# Altium PCB boardR.PcbDoc
Units mil, origin at the board's own origin, x right, y up, seen from the top; angles counter-clockwise.
Board outline 2200 x 3540 mil, 2 copper layers (Top Layer, Bottom Layer); 39 components, 40 nets, 157 pads, 0 vias.
Unrouted connection lines stored in the file: 16.
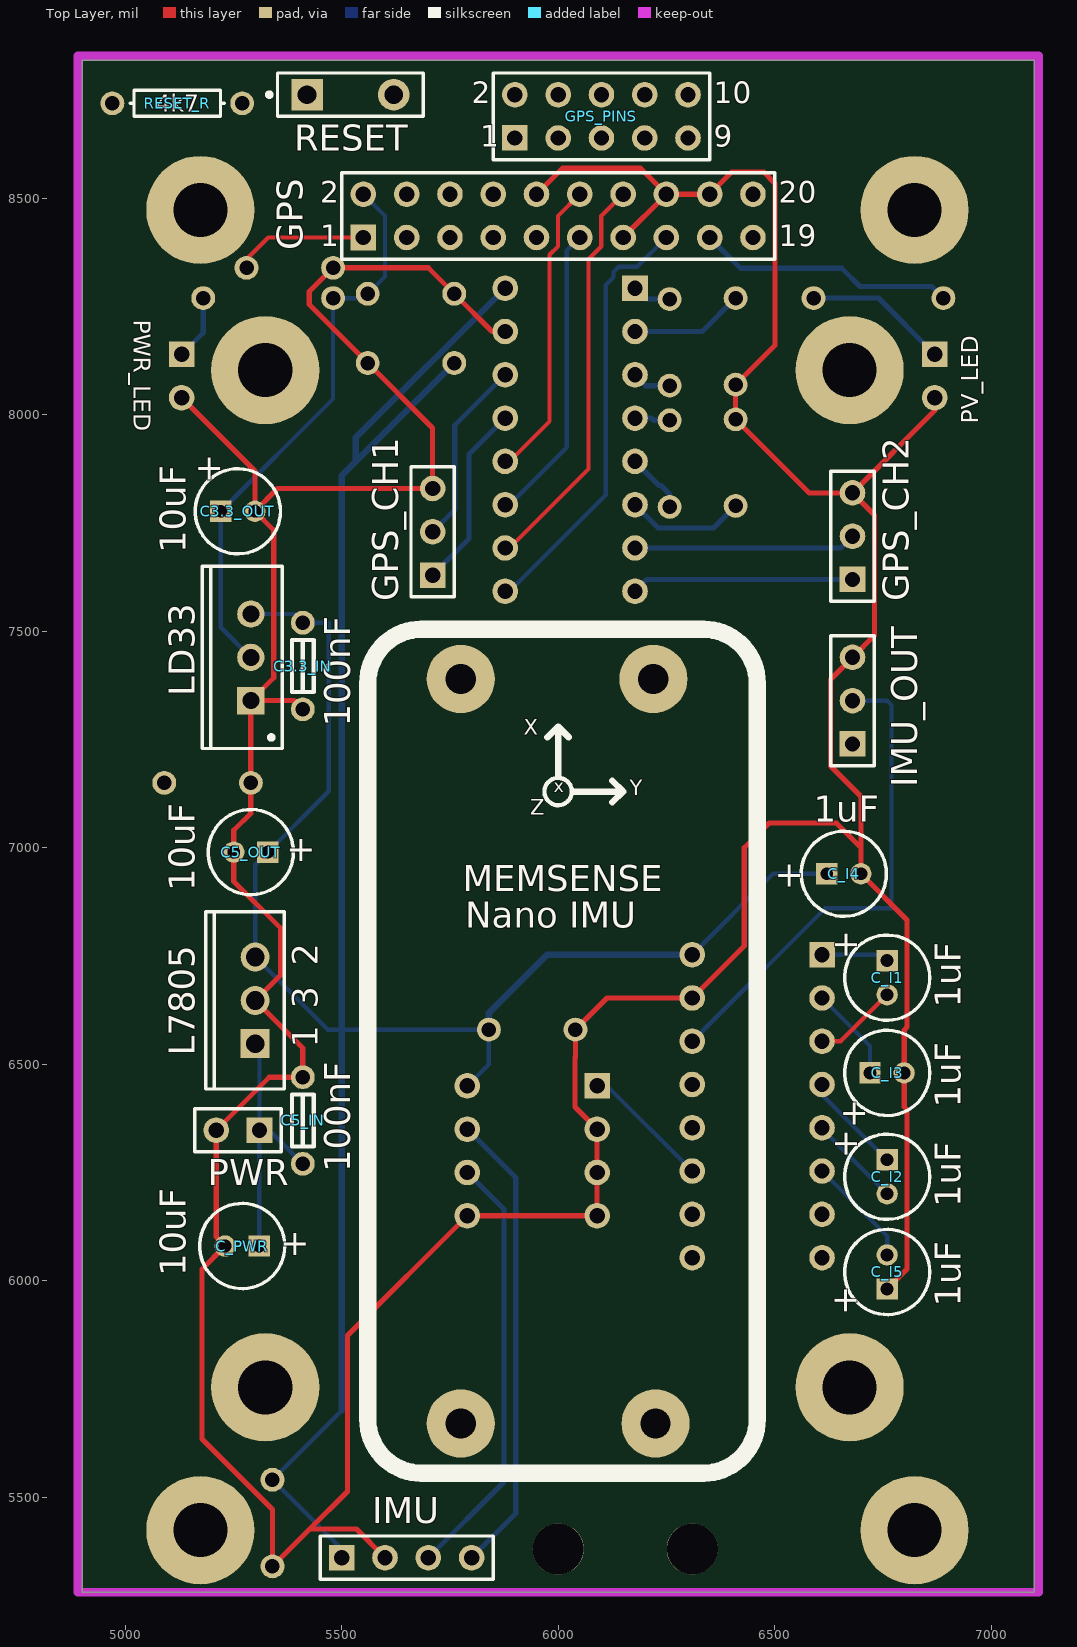
[diagram p0: Top Layer view]
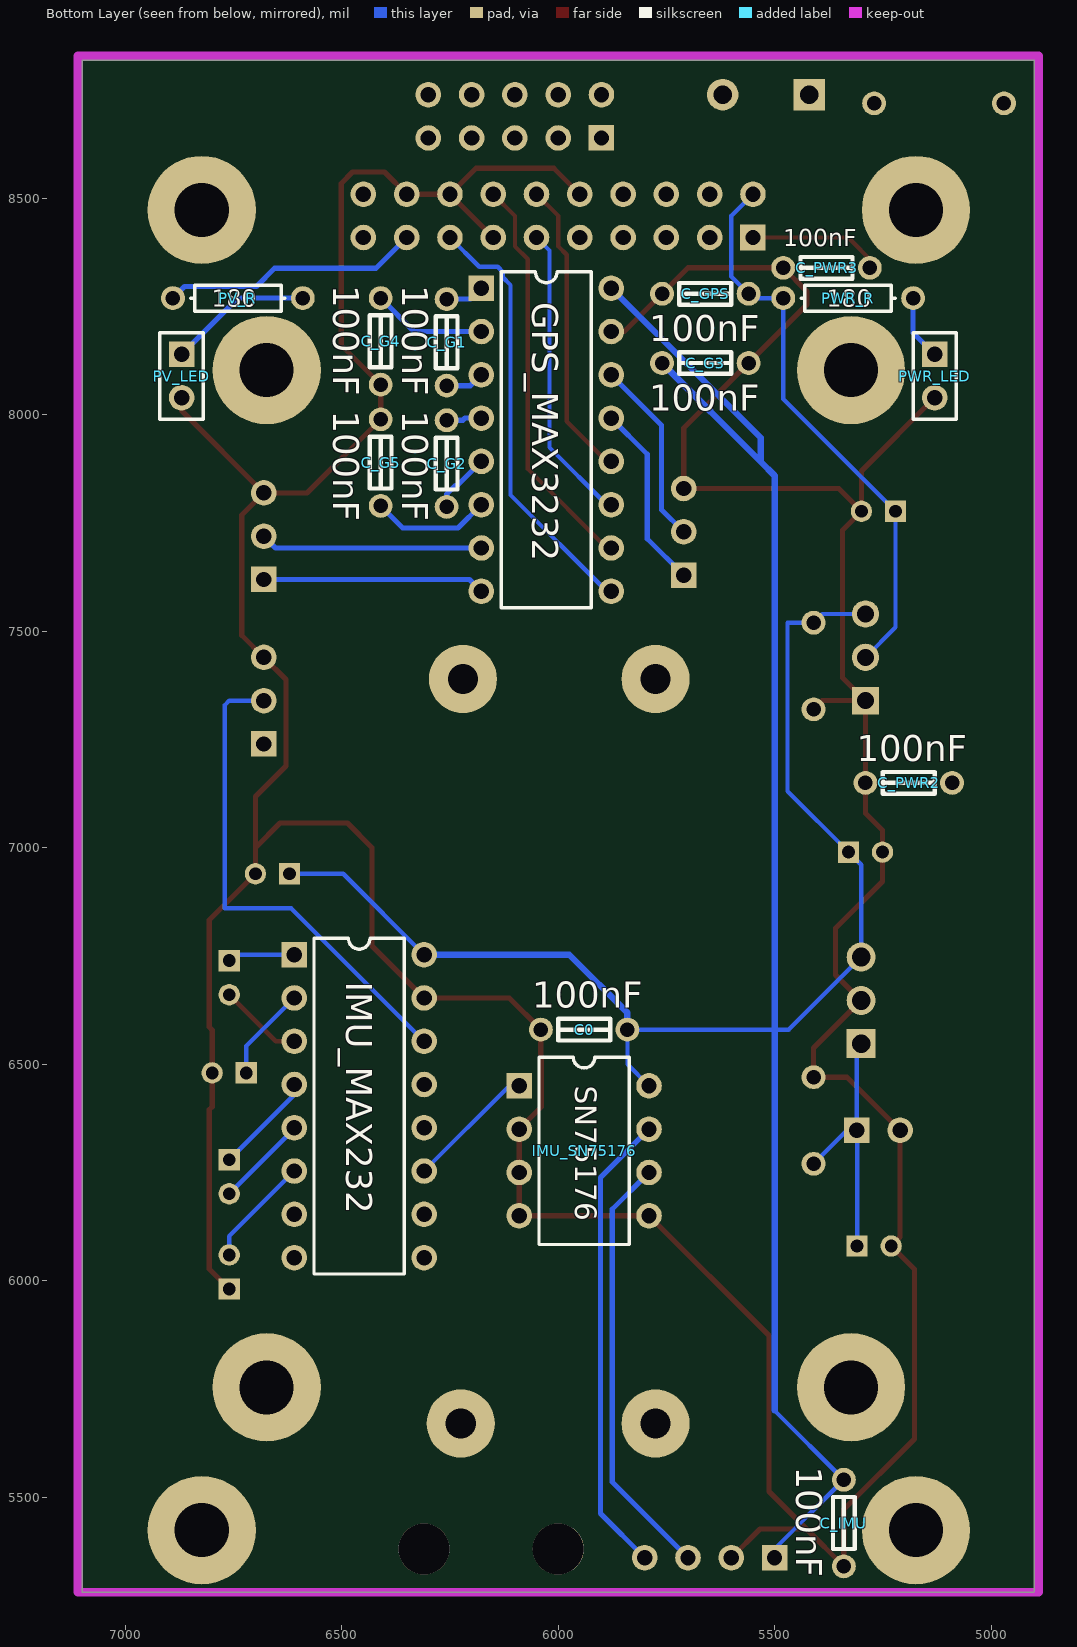
[diagram p1: Bottom Layer view, seen from below]

## Layer stack, top to bottom
Top Layer: signal copper 1.4
Dielectric: dielectric 12.6, FR-4, Dk 4.8
Bottom Layer: signal copper 1.4

## Board outline
4900,5280 7100,5280 7100,8820 4900,8820

## Design rules (kind name [scope] priority, off if disabled: settings)
Clearance [All] p1: gap=15
PolygonConnect [All] p1: connectstyle=Relief reliefconductorwidth=10 reliefentries=4 polygonreliefangle="90 Angle"
RoomDefinition schematic [InComponentClass('schematic')] p1: confinementstyle=ConfineIn formatcopy=TRUE lockcomponents=FALSE outline 3990,5110 3990,8880 4800,8880 4800,5110
RoutingLayers RoutingLayers_1 [InNet('GND')] p1: top layer_v5=TRUE bottom layer_v5=FALSE
RoutingLayers [All] p2: top layer_v5=FALSE bottom layer_v5=TRUE
RoutingTopology RoutingTopology_1 [(InNet('3.3V') OR InNet('5V') OR InNet('12V'))] p1: topology=Starburst
RoutingTopology [All] p2: topology=Shortest
RoutingVias [All] p1: holewidth=28 width=50 viastyle="Through Hole" minholewidth=28 minwidth=50 maxholewidth=28 maxwidth=50
SilkscreenOverComponentPads [All] p1: minsilkscreentomaskgap=10
SolderMaskExpansion [All] p1: expansion=4
TestPointUsage [All] p1: valid=0 allowmultiple=FALSE
Testpoint [All] p1: side=15 testpointundercomponent=TRUE minsize=40 maxsize=100 preferedsize=60 minholesize=0 maxholesize=40 preferedholesize=32 testpointgrid=1 style=1023 order=0-112345678
Width Width_1 [(InNet('3.3V') OR InNet('5V') OR InNet('12V'))] p1: maxlimit=20 minlimit=10 preferedwidth=15
Width [All] p2: maxlimit=20 minlimit=10 preferedwidth=12
21 further rules are at their usual default settings.

## Components (designator, comment, footprint, x,y, rotation, side; value= is the part's Value field where it differs from the comment)
C0 "100nF" C_NANO_HOLES 6040,6580 r180 bottom
C3.3_IN "100nF" C_NANO_HOLES 5410,7520 r270 top
C3.3_OUT "10uF" B 5260,7777.48 r0 top
C5_IN "100nF" C_NANO_HOLES 5410,6270 r90 top
C5_OUT "10uF" B 5290,6990 r180 top
C_G1 "100nF" C_NANO_HOLES 6257.56,8067.72 r90 bottom
C_G2 "100nF" C_NANO_HOLES 6257.56,7787.72 r90 bottom
C_G3 "100nF" C_NANO_HOLES 5560,8120 r0 bottom
C_G4 "100nF" C_NANO_HOLES 6410,8070 r90 bottom
C_G5 "100nF" C_NANO_HOLES 6410,7990 r270 bottom
C_GPS "100nF" C_NANO_HOLES 5760,8280 r180 bottom
C_I1 "1uF" B 6760,6700 r270 top
C_I2 "1uF" B 6760,6240 r270 top
C_I3 "1uF" B 6760,6480 r0 top
C_I4 "1uF" B 6660,6940 r0 top
C_I5 "1uF" B 6760,6020 r90 top
C_IMU "100nF" C_NANO_HOLES 5340,5340 r90 bottom
C_PWR "10uF" B 5270,6080 r180 top
C_PWR2 "100nF" C_NANO_HOLES 5290,7150 r180 bottom
C_PWR3 "100nF" C_NANO_HOLES 5480,8340 r180 bottom
GPS "Header 10X2" HDR2X10 5550,8410 r0 top
GPS_CH1 "MHDR1X3" HDR1X3 5710,7630 r90 top
GPS_CH2 "MHDR1X3" HDR1X3 6680,7620 r90 top
GPS_MAX3232 "MAX3232EEPE" PE16 6027.56,7942.72 r270 bottom
GPS_PINS "Header 5X2" HDR2X5 5900,8640 r0 top
IMU "Header 4" HDR1X4 5500,5360 r0 top
IMU_MAX232 "MAX232ACPE" PE16A 6459.69,6403.15 r270 bottom
IMU_OUT "MHDR1X3" HDR1X3 6680,7240 r90 top
IMU_SN75176 "SN75176" P008 5940,6300 r270 bottom
L7805 "L7805ACV" TO220ABN 5300,6647.48 r90 top
LD33 "LD33V" T03B 5290,7440 r90 top
PV_LED "LED" HDR1X2 6870,8140 r270 bottom
PV_R "180" AXIAL-0.3 6740,8270 r0 bottom
PWR "Header 2" HDR1X2 5310,6347.48 r180 top
PWR_LED "LED" HDR1X2 5130,8140 r270 bottom
PWR_R "180" AXIAL-0.3 5330,8270 r0 bottom
RESET "SW-PB" SPST-2 5520,8740 r0 top
RESET_R "4k7" AXIAL-0.3 5120,8720 r180 top
? "Comment" MEMSENSE_NANO_IMU 6000,6530 r0 top

## Footprints (in the part's own frame and the unit in brackets; to place one, negate y for a bottom-side part, rotate by r counter-clockwise, add the part's x,y. Pads: shape width x height; smd on the part's side, far side on the other; paste and mask are expansions set on the pad)
AXIAL-0.3 [mm] "Resistor; 2 Leads"
  round 1.4 hole 0.85: 1(-3.81,0) 2(3.81,0)
  silkscreen extent -2.77,-0.76 2.77,0.76
B [mm] "Capacitor, Electrolytic, Radial; Body 5 x 6.8 mm (Dia.xH typ); Pin Spacing 2 mm (typ)"
  rect 1.25x1.25 hole 0.75: 1(-1,0)
  round 1.25 hole 0.75: 2(1,0)
  silkscreen extent -2.5,-2.5 2.5,2.5
C_NANO_HOLES [mm] "C_NANO com furos maiores"
  round 1.4 hole 0.85: 1(0,0) 2(5.08,0)
  silkscreen extent 1.02,-0.64 4.06,0.63
HDR1X2 [mm] "Connector; Header; 2 Position"
  rect 1.5x1.5 hole 0.9: 1(0,0)
  round 1.5 hole 0.9: 2(2.54,0)
  silkscreen extent -1.27,-1.27 3.81,1.27
HDR1X3 [mm] "Connector; Header; 3 Position"
  rect 1.5x1.5 hole 0.9: 1(0,0)
  round 1.5 hole 0.9: 2(2.54,0) 3(5.08,0)
  silkscreen extent -1.27,-1.27 6.35,1.27
HDR1X4 [mm] "Connector; Header; 4 Position"
  rect 1.5x1.5 hole 0.9: 1(0,0)
  round 1.5 hole 0.9: 2(2.54,0) 3(5.08,0) 4(7.62,0)
  silkscreen extent -1.27,-1.27 8.89,1.27
HDR2X5 [mm] "Connector; Header; 5x2 Position"
  rect 1.5x1.5 hole 0.9: 1(0,0)
  round 1.5 hole 0.9: 2(0,2.54) 3(2.54,0) 4(2.54,2.54) 5(5.08,0) 6(5.08,2.54) 7(7.62,0) 8(7.62,2.54) 9(10.16,0) 10(10.16,2.54)
  silkscreen extent -1.27,-1.27 11.43,3.81
HDR2X10 [mm] "Connector; Header; 10x2 Position"
  rect 1.5x1.5 hole 0.9: 1(0,0)
  round 1.5 hole 0.9: 2(0,2.54) 3(2.54,0) 4(2.54,2.54) 5(5.08,0) 6(5.08,2.54) 7(7.62,0) 8(7.62,2.54) 9(10.16,0) 10(10.16,2.54) 11(12.7,0) 12(12.7,2.54) 13(15.24,0) 14(15.24,2.54) 15(17.78,0) 16(17.78,2.54) 17(20.32,0) 18(20.32,2.54) 19(22.86,0) 20(22.86,2.54)
  silkscreen extent -1.27,-1.27 24.13,3.81
MEMSENSE_NANO_IMU [mil]
  round 157.48 hole 70: 0(-225,860) 1(220,860) 2(-225,-860) 3(225,-860)
  silkscreen extent -440,-975 460,975
P008 [mm] "DIP; 8 Leads; Row Spacing 7.62 mm; Pitch 2.54 mm"
  rect 1.5x1.5 hole 0.9: 1(-3.81,-3.81)
  round 1.5 hole 0.9: 2(-1.27,-3.81) 3(1.27,-3.81) 4(3.81,-3.81) 5(3.81,3.81) 6(1.27,3.81) 7(-1.27,3.81) 8(-3.81,3.81)
  silkscreen extent -5.5,-2.65 5.5,2.65
PE16 [mm] "DIP; 16 Leads; Row Spacing 7.62 mm; Pitch 2.54 mm"
  rect 1.5x1.5 hole 0.9: 1(-8.89,-3.81)
  round 1.5 hole 0.9: 2(-6.35,-3.81) 3(-3.81,-3.81) 4(-1.27,-3.81) 5(1.27,-3.81) 6(3.81,-3.81) 7(6.35,-3.81) 8(8.89,-3.81) 9(8.89,3.81) 10(6.35,3.81) 11(3.81,3.81) 12(1.27,3.81) 13(-1.27,3.81) 14(-3.81,3.81) 15(-6.35,3.81) 16(-8.89,3.81)
  silkscreen extent -9.85,-2.65 9.85,2.65
PE16A [mm] "DIP; 16 Leads; Row Spacing 7.62 mm; Pitch 2.54 mm"
  rect 1.5x1.5 hole 0.9: 1(-8.89,-3.81)
  round 1.5 hole 0.9: 2(-6.35,-3.81) 3(-3.81,-3.81) 4(-1.27,-3.81) 5(1.27,-3.81) 6(3.81,-3.81) 7(6.35,-3.81) 8(8.89,-3.81) 9(8.89,3.81) 10(6.35,3.81) 11(3.81,3.81) 12(1.27,3.81) 13(-1.27,3.81) 14(-3.81,3.81) 15(-6.35,3.81) 16(-8.89,3.81)
  silkscreen extent -9.85,-2.65 9.85,2.65
SPST-2 [mm] "Circuit Breaker; 2 Leads"
  rect 1.85x1.85 hole 1.1: 1(-2.54,0)
  round 1.85 hole 1.1: 2(2.54,0)
  silkscreen extent -4.89,-1.27 4.28,1.27
T03B [mm] "TO, Thru-Hole, Vertical, Heatsink Mounted; 3 In-Line Leads; Pitch 2.54 mm"
  rect 1.6x1.6 hole 1: 1(-2.54,0)
  round 1.6 hole 1: 2(0,0) 3(2.54,0)
  silkscreen extent -5.35,-1.85 5.35,2.85, body extent -5.4,-1.9 5.4,2.9, height 19.4
TO220ABN [mm] "TO, Thru-Hole, Vertical, Heatsink Mounted; 3 In-Line Leads; Pitch 2.54 mm; Pin sequence 1, 3, 2"
  rect 1.7x1.7 hole 1.1: 1(-2.54,0)
  round 1.7 hole 1.1: 2(2.54,0) 3(0,0)
  silkscreen extent -5.2,-1.7 5.2,2.9

## Part data
C0 C3.3_IN C5_IN C_G1 C_G2 C_G3 C_G4 C_G5 C_GPS C_IMU C_PWR2 C_PWR3: library part Cap, "Capacitor"
C3.3_OUT C5_OUT C_I1 C_I2 C_I3 C_I4 C_I5 C_PWR: library part "Cap Pol1", "Polarized Capacitor (Radial)"
GPS: "Header, 10-Pin, Dual row"
GPS_CH1 GPS_CH2 IMU_OUT: "Header, 3-Pin"
GPS_MAX3232: "±15kV ESD-Protected, 3.0V to 5.5V, Low-Power, up to 250kbps, True RS-232 Transceiver"
GPS_PINS: "Header, 5-Pin, Dual row"
IMU: "Header, 4-Pin"
IMU_MAX232: "+5V Powered, Multi-Channel RS-232 Driver/Receiver"
IMU_SN75176: library part SN75176AP, "Differential Bus Transceiver"
L7805: "Precision 1A Regulator"
LD33: library part LM1117T-3.3, "800mA Low-Dropout Linear Regulator"
PV_LED PWR_LED: library part LED0, "Typical INFRARED GaAs LED"
PV_R PWR_R RESET_R: library part Res1, "Resistor"
PWR: "Header, 2-Pin"
RESET: "Switch"

## Free pads (board coordinates)
  round 250 hole 125: 0(5173.39,8473.58) 0(5323.39,8103.58) 1(6673.39,8103.58) 1(6823.39,8473.58) 2(6673.39,5753.58) 2(6823.39,5423.58) 3(5173.39,5423.58) 3(5323.39,5753.58)
  round 118.11 hole 118.11: ""(6000,5380) ""(6310,5380)

## Nets (pads, with @x,y where several pads share a name; then routed paths per layer and width w, separated by ;. In a path a pad name is that pad's centre, name@x,y a point inside that pad or via, vN(x,y) a via of type N, cw(c..) or ccw(c..) an arc to the next point about the centre after c; other vN are vias at no path point)
3.3V: C3.3_OUT.1 C_GPS.2 GPS.2 LD33.2 PWR_R.2 RESET_R.2 | length 1317.6
  Bottom Layer w10: LD33.2 5220.63,7509.37 C3.3_OUT.1 5480,8036.85 PWR_R.2 5550,8270 C_GPS.2 5600,8320 5600,8460 GPS.2
5V: C0.2 C3.3_IN.1 C5_OUT.1 C_G3.2 C_I4.1 C_IMU.2 GPS_MAX3232.16 IMU.1 IMU_MAX232.16 IMU_SN75176.8 L7805.2 LD33.3 | length 7168
  Bottom Layer w10: LD33.3 5390,7540 C3.3_IN.1 5470,7520 5470,7130.63 C5_OUT.1 5300,6960.63 L7805.2 5467.48,6580 5500,6580 ; IMU.1 5500,5380 C_IMU.2 5500,5700 5500,6580 ; IMU_SN75176.8 5840,6500 C0.2 5500,6580 ; IMU_MAX232.16 6496.54,6940 C_I4.1
  Bottom Layer w15: 5500,5700 5500,6279 5500,6580 5500,7860 5532,7892 ; C_G3.2 5532,7892 ; C0.2 5840,6619 5974.15,6753.15 IMU_MAX232.16 ; GPS_MAX3232.16 5532,7947.16 5532,7892
12V: C5_IN.1 C_PWR2.2 C_PWR3.2 C_PWR.1 GPS.1 L7805.1 PWR.1 | length 939.4
  Top Layer w10: C_PWR3.2@5270,8350 5330,8410 GPS.1
  Bottom Layer w10: L7805.1@5282.52,6547.48 L7805.1@5290,6547.48 ; L7805.1 5310,6537.48 PWR.1 5332.52,6347.48 C5_IN.1 ; C_PWR.1 PWR.1@5309.37,6346.85
  Bottom Layer w15: C_PWR3.2@5280,8326 C_PWR3.2 ; L7805.1@5290,6547.48 L7805.1
GND: C0.1 C3.3_IN.2 C3.3_OUT.2 C5_IN.2 C5_OUT.2 C_G3.1 C_G4.1 C_G5.1 C_GPS.1 C_I3.2 C_I4.2 C_I5.1 C_IMU.1 C_PWR2.1 C_PWR3.1 C_PWR.2 GPS.10 GPS.13 GPS.16 GPS.18 GPS_CH1.3 GPS_CH2.3 GPS_MAX3232.15 GPS_PINS.3 GPS_PINS.9 GPS_PINS.10 IMU.2 IMU_MAX232.15 IMU_OUT.3 IMU_SN75176.2 IMU_SN75176.3 IMU_SN75176.4 IMU_SN75176.5 L7805.3 LD33.1 PV_LED.2 PWR.2 PWR_LED.2 RESET.1 | length 11796.9
  Top Layer w12: PWR_LED.2 5299.37,7870.63 C3.3_OUT.2 ; C3.3_IN.2 5390,7340 LD33.1 ; IMU.2 5534,5426 5426,5426 ; GPS_MAX3232.15 5847.28,8192.72 C_GPS.1 5700,8340 C_PWR3.1 5425,8285 5425,8255 C_G3.1 5710,7970 GPS_CH1.3 5351.89,7830 C3.3_OUT.2 ; GPS.10 6010,8570 6190,8570 GPS.16 ; GPS.13 GPS.16 ; C_I5.1 6806,6026.63 6806,6395 6799.37,6401.63 C_I3.2 6799.37,6579.37 6806,6586 6806,6833.37 C_I4.2 6699.37,7000 ; PV_LED.2 6870,8010 GPS_CH2.3 ; LD33.1 C_PWR2.1 5290,7080 5250.63,7040.63 C5_OUT.2 5250.63,6922.37 5359,6814 5359,6706.48 L7805.3 5410,6537.48 C5_IN.2 5332.52,6470 PWR.2 5210,6100.63 C_PWR.2 5177,6026.37 5177,5634.33 5340,5471.33 C_IMU.1 5426,5426 ; LD33.1 5343,7393 5343,7733.85 C3.3_OUT.2 ; 5426,5426 5513,5513 5513,5873 IMU_SN75176.5 IMU_SN75176.4 IMU_SN75176.3 IMU_SN75176.2 6039,6401 6039,6515 6040,6516 C0.1 6113.15,6653.15 IMU_MAX232.15 6430,6773.46 6430,7000 6487,7057 6642.37,7057 6699.37,7000 ; GPS.16 GPS.18 6401,8561 6475,8561 6501,8535 6501,8161 C_G4.1 C_G5.1 6580,7820 GPS_CH2.3 ; GPS_CH2.3 6731,7769 6731,7491 IMU_OUT.3 6629,7389 6629,7189 6699.37,7118.63 6699.37,7000
GPS_CAN2_RX: GPS.8
GPS_CAN2_TX: GPS.20
GPS_COM1_RX: GPS.12 GPS_MAX3232.12 | length 684.6
  Top Layer w10: GPS_MAX3232.12@5887.56,7892.72 5980,7985.16 5980,8369.96 5999.53,8389.49 5999.53,8459.53 GPS.12
GPS_COM1_TX: GPS.11 GPS_MAX3232.11 | length 694.6
  Bottom Layer w10: GPS_MAX3232.11@5887.56,7792.72 6020,7925.16 6020,8380 GPS.11
  Bottom Layer w12: GPS_MAX3232.11 GPS_MAX3232.11@5887.56,7792.72
GPS_COM2_RX: GPS.15 GPS_MAX3232.9 | length 1002.3
  Bottom Layer w10: GPS_MAX3232.9@5887.56,7592.72 6110,7815.16 6110,8300 6128.03,8318.03 6128.03,8330.53 6139.75,8342.25 6182.25,8342.25 GPS.15
  Bottom Layer w12: GPS_MAX3232.9 GPS_MAX3232.9@5887.56,7592.72
GPS_COM2_TX: GPS.14 GPS_MAX3232.10 | length 926
  Top Layer w10: GPS_MAX3232.10@5887.56,7692.72 6070,7875.16 6070,8359.96 6099.53,8389.49 6099.53,8459.53 GPS.14
GPS_EVENT1: GPS.9 GPS_PINS.6
GPS_EVENT2: GPS.7 GPS_PINS.8
GPS_PPS: GPS.19 GPS_PINS.7
GPS_PV: GPS.17 GPS_PINS.5 PV_R.2 | length 598
  Bottom Layer w12: GPS.17 6421,8339 6655,8339 6697,8297 6863,8297 PV_R.2
GPS_RESETIN: GPS.5 GPS_PINS.4 RESET.2 RESET_R.1
GPS_USB_D+: GPS.4 GPS_PINS.1
GPS_USB_D-: GPS.3 GPS_PINS.2
GPS_VARF: GPS.6
IMU_HRS_A: IMU.3 IMU_SN75176.6 | length 997.7
  Bottom Layer w12: IMU.3 5875,5535 5875,6165 IMU_SN75176.6
IMU_HRS_B: IMU.4 IMU_SN75176.7 | length 1078.6
  Bottom Layer w12: IMU_SN75176.7 5902,6238 5902,5462 IMU.4
IMU_TX: IMU_MAX232.11 IMU_SN75176.1 | length 301.2
  Bottom Layer w10: IMU_SN75176.1 6112.84,6450 IMU_MAX232.11
J1_RX: GPS_CH1.2 GPS_MAX3232.14 | length 432.1
  Bottom Layer w12: GPS_CH1.2 5761,7781 5761,7976.16 GPS_MAX3232.14
J1_TX: GPS_CH1.1 GPS_MAX3232.13 | length 432.1
  Bottom Layer w12: GPS_CH1.1 5794,7714 5794,7909.16 GPS_MAX3232.13
J2_RX: GPS_CH2.2 GPS_MAX3232.7 | length 513.7
  Bottom Layer w12: GPS_MAX3232.7 6652.72,7692.72 GPS_CH2.2
J2_TX: GPS_CH2.1 GPS_MAX3232.8 | length 513.7
  Bottom Layer w12: GPS_MAX3232.8 6204.84,7620 GPS_CH2.1
J3_RX: IMU_MAX232.14 IMU_OUT.2 | length 1151.6
  Bottom Layer w10: IMU_MAX232.14 6616.54,6860 6770,6860 6770,7330 6760,7340 IMU_OUT.2
NetC_G1_1: C_G1.1 GPS_MAX3232.3 | length 90.4
  Bottom Layer w12: GPS_MAX3232.3 6202.56,8067.72 C_G1.1
NetC_G1_2: C_G1.2 GPS_MAX3232.1 | length 90.4
  Bottom Layer w12: GPS_MAX3232.1 6202.56,8267.72 C_G1.2
NetC_G2_1: C_G2.1 GPS_MAX3232.5 | length 140.8
  Bottom Layer w12: GPS_MAX3232.5 6233,7837.28 6237.5,7837.28 6257.56,7817.22 C_G2.1
NetC_G2_2: C_G2.2 GPS_MAX3232.4 | length 82.1
  Bottom Layer w12: GPS_MAX3232.4 6215,7992.72 6220,7987.72 C_G2.2
NetC_G4_2: C_G4.2 GPS_MAX3232.2 | length 264.5
  Bottom Layer w12: GPS_MAX3232.2 6332.72,8192.72 C_G4.2
NetC_G5_2: C_G5.2 GPS_MAX3232.6 | length 275.8
  Bottom Layer w12: GPS_MAX3232.6 6231.28,7739 6359,7739 C_G5.2
NetC_I1_1: C_I1.1 IMU_MAX232.1 | length 156
  Bottom Layer w10: IMU_MAX232.1 6746.22,6753.15 C_I1.1
NetC_I1_2: C_I1.2 IMU_MAX232.3 | length 194.8
  Top Layer w10: IMU_MAX232.3 6652.52,6553.15 C_I1.2
NetC_I2_1: C_I2.1 IMU_MAX232.4 | length 247.7
  Bottom Layer w10: IMU_MAX232.4@6609.69,6441.5 IMU_MAX232.4 6609.69,6429.69 C_I2.1
NetC_I2_2: C_I2.2 IMU_MAX232.5 | length 224.4
  Bottom Layer w10: IMU_MAX232.5@6609.69,6350.95 C_I2.2 ; IMU_MAX232.5 IMU_MAX232.5@6619.29,6353.15
  Bottom Layer w12: IMU_MAX232.5@6609.69,6350.95 IMU_MAX232.5
NetC_I3_1: C_I3.1 IMU_MAX232.2 | length 219.1
  Bottom Layer w10: IMU_MAX232.2 6720.63,6542.2 C_I3.1
NetC_I5_2: C_I5.2 IMU_MAX232.6 | length 264.5
  Bottom Layer w10: IMU_MAX232.6@6609.69,6244.64 IMU_MAX232.6 6760,6102.83 C_I5.2
NetPV_LED_1: PV_LED.1 PV_R.1 | length 333.8
  Bottom Layer w12: PV_R.1 6740,8270 PV_LED.1
NetPWR_LED_1: PWR_LED.1 PWR_R.1 | length 150.7
  Bottom Layer w12: PWR_LED.1 5180,8190 PWR_R.1
pads on no net: ?.0 ?.1 ?.2 ?.3 IMU_MAX232.7 IMU_MAX232.8 IMU_MAX232.9 IMU_MAX232.10 IMU_MAX232.12 IMU_MAX232.13 IMU_OUT.1

## Keep-outs
Keep-Out Layer:
  lines w19.68: 4890,5280 7110,5280 7110,8830 4890,8830 4890,6354.29 4890,5280

## Text inside footprints (layer, text, board x,y; h text height)
C3.3_OUT: Top Overlay "+" at 5160,7850 h59.06
C5_OUT: Top Overlay "+" at 5440,7020 h59.06 r180
C_I1: Top Overlay "+" at 6640,6810 h59.06 r270
C_I2: Top Overlay "+" at 6640,6350 h59.06 r270
C_I3: Top Overlay "+" at 6650,6360 h59.06
C_I4: Top Overlay "+" at 6500,6910 h59.06
C_I5: Top Overlay "+" at 6690,5920 h59.06 r90
C_PWR: Top Overlay "+" at 5426.5,6109.53 h59.06 r180
GPS: Top Overlay "2" at 5450,8490 h50; Top Overlay "1" at 5450,8390 h50; Top Overlay "19" at 6510,8390 h50; Top Overlay "20" at 6510,8490 h50
GPS_PINS: Top Overlay "10" at 6360,8720 h50; Top Overlay "9" at 6360,8620 h50; Top Overlay "1" at 5820,8620 h50; Top Overlay "2" at 5800,8720 h50
L7805: Top Overlay "3" at 5444.69,6627.8 h59.06 r90; Top Overlay "2" at 5444.69,6727.8 h59.06 r90; Top Overlay "1" at 5444.69,6537.64 h59.06 r90
?: Top Overlay "Nano IMU" at 5785.07,6815 h60; Top Overlay "MEMSENSE" at 5780,6900 h60; Top Overlay "x" at 5990,7118 h50; Top Overlay "X" at 5920,7250 h60; Top Overlay "Y" at 6165,7110 h60; Top Overlay "Z" at 5935,7065 h60